# Altium PCB УШЯИ 758727.206-1.PcbDoc (part 2 of 2)
Units mm, origin at the board's own origin, x right, y up, seen from the top; angles counter-clockwise.
Board outline 245 x 230 mm, 2 copper layers (Top Layer, Bottom Layer), stack 1.571 mm thick; 127 components, 117 nets, 572 pads, 132 vias.
Unrouted connection lines stored in the file: 2.
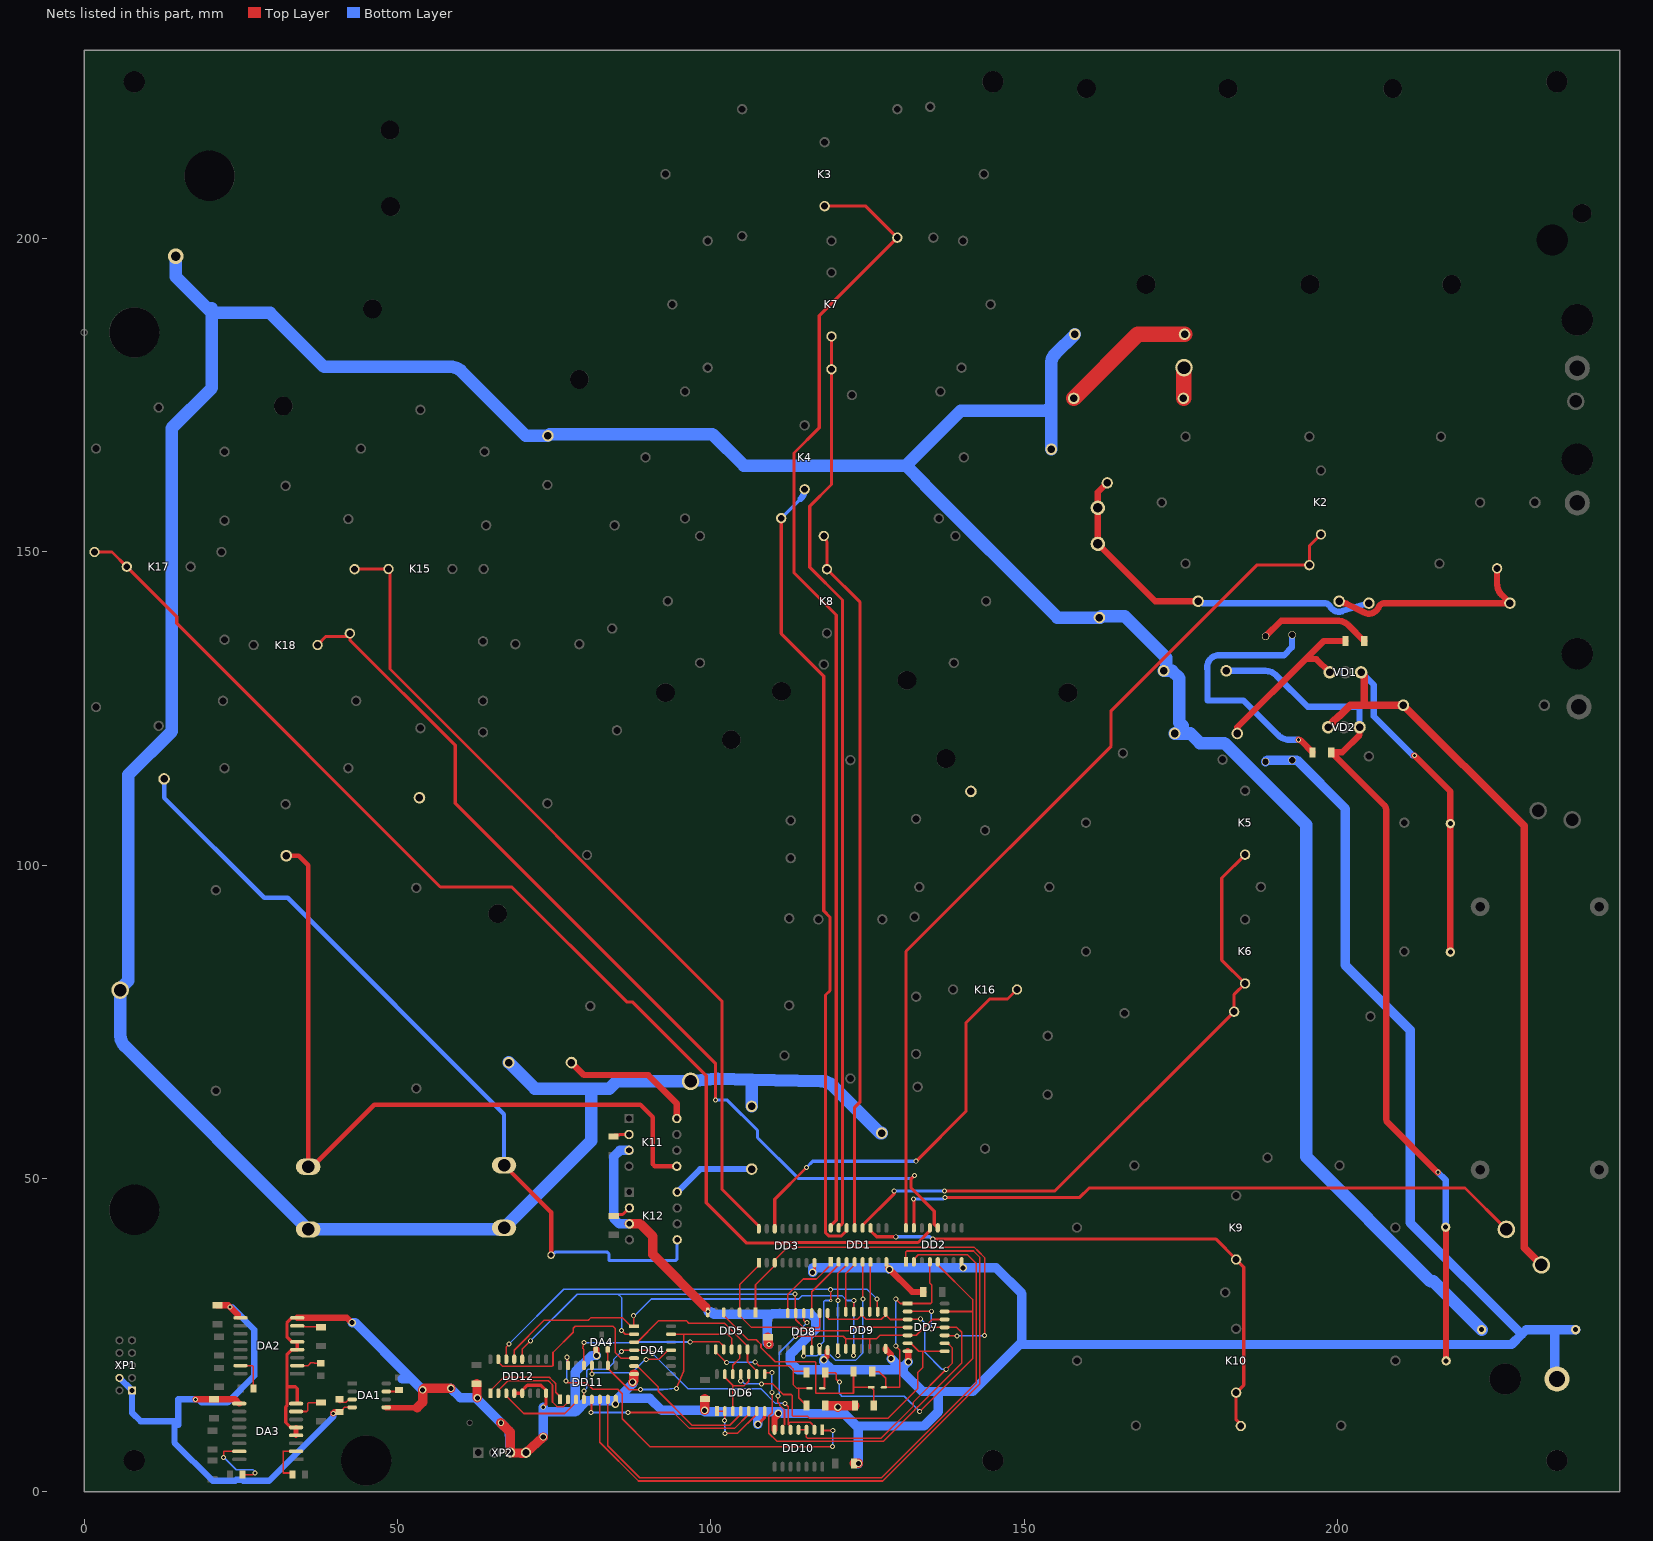
[diagram p2: the nets of this part, all layers, seen from the top]

## Via types
v1: diameter 0.8, hole 0.5, Top Layer to Bottom Layer, 107 vias
v2: diameter 1.2, hole 0.8, Top Layer to Bottom Layer, 24 vias
v3: diameter 0.5, hole 0.3, Top Layer to Bottom Layer, 1 vias

## Nets (pads, with @x,y where several pads share a name; then routed paths per layer and width w, separated by ;. In a path a pad name is that pad's centre, name@x,y a point inside that pad or via, vN(x,y) a via of type N, cw(c..) or ccw(c..) an arc to the next point about the centre after c; other vN are vias at no path point) (continued)
GND: C6.1 C7.2 pad.26@5.75,80.05 pad.26@96.75,65.5 R1.2 R6.2 R13.1 R17.1 R18.1 R19.2 R25.1 R26.1 R27.2 R28.2 R33.1 | length 661.5
  Bottom Layer w2: R33.1@14.607,197.162 14.607,193.893 20.385,188.115 29.68,188.115 38.295,179.5 58.448,179.5 cw(c58.448,176.96) 60.244,178.756 70.5,168.5 R25.1@74,168.5 74.25,168.75 100.25,168.75 105.25,163.75 131.125,163.75 ; 20.385,188.865 20.385,176.14 13.971,169.726 13.971,121.354 7,114.383 7,81.516 5.75,80.266 5.75,72.909 ccw(c8.29,72.909) 6.494,71.113 C6.1@35.742,41.865 66.388,41.865 ccw(c66.388,42.719) C7.2@66.992,42.115 80.875,55.998 80.875,64.321 ; R28.2@67.75,68.5 71.929,64.321 80.875,64.321 ; R27.2@106.5,61.5 106.501,65.771 ; R26.1@127.25,57.25 127,57.25 119.494,64.756 ccw(c117.698,62.96) 117.698,65.5 cw(c117.698,67.5) 117.649,65.501 106.501,65.771 ; R18.1@154.325,166.35 154.325,172.5 154.325,173.25 ; R6.2@158.075,184.7 154.911,181.536 ccw(c156.325,180.122) 154.725,181.322 ccw(c156.325,180.122) 154.325,180.122 154.325,173.25 ; R13.1@174,121 175.25,121 ; R1.2@222.992,25.865 215.273,33.584 214.857,33.584 195,53.442 195,106.415 181.947,119.468 178.032,119.468 176.5,121 175.25,121 ; 80.875,64.321 83.788,64.321 84.967,65.5 pad.26@96.75,65.5 ccw(c96.632,66.748) pad.26@96.75,65.5 97.421,65.565 100.836,65.896 cw(c101,64.25) 101.043,65.903 106.501,65.771 ; 131.125,163.75 139.875,172.5 153.575,172.5 154.325,173.25 ; 131.125,163.75 134.125,160.75 134.125,160.675 155.3,139.5 162.095,139.5 162.295,139.7 166.05,139.7 172.672,133.078 172.672,131.422 R19.2@172.25,131 173.578,131 174.75,129.828 174.75,122.75 175.25,122.25 175.25,121
GNDI: C2.2 C3.2 C8.2 C9.1 C10.1 C14.1 C15.1 C16.1 C20.2 C21.1 DA1.5 DA2.4 DA2.5 DA2.8 DA3.4 DA3.5 DA3.8 DA4.1 DD1.8 DD2.8 DD3.8 DD4.7 DD5.7 DD6.7 DD7.7 DD8.7 DD9.7 DD10.7 DD11.8 DD12.4 DD12.5 DD12.8 K11.3 K12.3 pad.38@235,18 R1.1 XP2.3 XP2.4 | length 602.3
  Top Layer w0.5: DA3.5@33.806,10.27 32.948,10.27 32.153,11.065 32.153,13.544 32.343,13.734 32.343,16.761 32.343,17 ; DA3.8@33.806,14.08 34,14.08 34,16.468 33.707,16.761 32.583,16.761 32.343,17 ; DA2.8@33.996,27.752 33.138,27.752 32.343,26.957 32.343,24.737 33.138,23.942 DA2.5@33.996,23.942 DA2.4@33.996,22.672 33.138,22.672 32.343,21.877 32.343,17 ; v2@42.669,27 v2(42.75,27) ; DD12.4@68.625,15.726 DD12.5@69.895,15.726 69.895,16.163 70.724,16.993 72.876,16.993 73.705,16.163 DD12.8@73.705,15.726 73.705,14.036 73.25,13.581 v1(73.25,13.5) ; v2(107.5,10.75) 108.556,11.806 108.556,12.856 DD6.7@108.575,12.875 ; v2(116.25,35) 116.25,35.189 116.508,35.448 116.508,36.524 DD3.8@116.537,36.553
  Top Layer w0.8: DA3.4@33.806,9 DA3.5@33.806,10.27 ; DA1.5@48.187,13.411 53.121,13.411 ; v2(118.025,21.05) 118.52,21.545 118.52,22.5 DD8.7@118.62,22.6
  Top Layer w1: DA2.8@33.996,27.752 41.916,27.752 v2@42.669,27 ; DA4.1@81.725,22.75 81.75,22.725 v2(81.75,21.75) ; DD10.7@110.165,9.9 110.165,11.756 110.712,12.303 110.712,12.462 v2(110.75,12.5) ; DD9.7@127.88,22.825 127.88,22.725 128.75,21.855 v2(128.75,21.25) ; v2@128.25,35.75 v2(128.5,35.5) 132.1,31.9 C16.1@133.9,31.9 ; DD7.7@131.4,22.42 131.5,22.32 v2(131.5,20.75)
  Top Layer w1.5: 53.121,13.411 54,14.29 v2(54,16.25) 54.25,16.5 v2(58.5,16.5) ; C10.1@62.625,17.225 62.675,17.175 62.675,15.075 v2(62.75,15) ; C8.2@66.5,11 67.96,9.54 XP2.3@67.96,6.25 69.704,6.141 ccw(c69.797,7.638) 70.094,6.168 XP2.4@70.5,6.25 v2(73.25,8.75) ; K12.3@87,42.75 88.75,42.75 90.75,40.75 90.75,37.861 99.179,29.432 ; v2(87.5,17.5) 87.7,17.7 87.7,18.745 DD4.7@87.75,18.795 ; v2(99,13) 99,14.8 C15.1@99.025,14.825 ; C9.1@109.1,24.675 109.15,24.625 109.15,23.753 109.25,23.653 v1(109.25,23.5) ; C21.1@118.5,13.707 120.043,13.707 v2(120.25,13.5) 120.5,13.75 C20.2@123,13.75 ; C14.1@122.85,4.55 v2(123.55,4.55)
  Bottom Layer w1.5: v2(42.75,27) 43.25,27 52.25,18 ; 50.75,18 52.25,18 ; v2(54,16.25) 52.25,18 ; v2(58.5,16.5) 60,15 v2(62.75,15) 62.75,14.75 C8.2@66.5,11 67.825,9.675 XP2.3@67.96,6.25 ; v2(73.25,8.75) 73.25,12.75 ; v1(73.25,13.5) 73.25,12.75 ; v2(81.75,21.75) 80.987,21.75 78.336,19.099 78.336,15.508 78.375,15.469 78.375,12.75 ; 85.896,14.896 90.25,14.896 92.146,13 v2(99,13) ; K11.3@86.94,54.48 85.48,54.48 84.5,53.5 84.5,43.629 85.379,42.75 K12.3@87,42.75 ; v2(87.5,17.5) 87.5,17.25 85.521,15.271 84.75,14.5 80.125,14.5 78.375,12.75 ; v2@99,12.804 107.897,12.804 ; v1(99.531,28.778) 99.559,28.75 100,28.75 100.429,28.321 109,28.321 ; v2(107.5,10.75) 107.5,12.407 107.897,12.804 ; v1(109.25,23.5) 109,23.75 109,28.321 ; v2(110.75,12.5) 110.806,12.5 v2@111.11,12.804 ; v2(116.25,35) 116.25,35.5 116.5,35.75 ; 116.25,35.75 116.5,35.75 ; v2(118.025,21.05) 118,21.025 118,20.75 119.25,19.5 ; v2(120.25,13.5) 121.25,12.5 ; v2(123.55,4.55) 123.5,4.5 123.5,10.25 123.25,10.5 ; v2(128.5,35.5) v2@128.5,35.75 ; v2(128.75,21.25) 130.052,19.948 130.698,19.948 ; 130.052,19.5 119.25,19.5 ; v2(131.5,20.75) 130.698,19.948 ; C3.2@188.5,116.5 188.75,116.75 193.5,116.75 201.25,109 201.25,84 211.563,73.688 211.563,42.937 229.375,25.125 ; pad.38@235,18 234.678,18.322 234.678,25.865 ; R1.1@237.992,25.865 234.678,25.865 ; 73.25,12.75 78.375,12.75 ; 107.897,12.804 v2@111.11,12.804 ; 109,28.321 109.757,28.321 109.821,28.385 115.907,28.385 116.729,27.563 116.729,25.979 112.677,21.927 112.677,20.685 113.862,19.5 119.25,19.5 ; v2@111.11,12.804 111.414,12.5 121.25,12.5 ; 116.5,35.75 v2@128.5,35.75 ; 121.25,12.5 123.25,10.5 ; 123.25,10.5 134,10.5 136.25,12.75 136.25,16 ; v2@128.5,35.75 v2(140.25,35.75) 145.5,35.75 149.625,31.625 149.625,23.861 149.264,23.5 ; 130.698,19.948 130.698,19.5 130.698,19.052 133.75,16 136.25,16 ; 136.25,16 141.764,16 149.264,23.5 ; 149.264,23.5 227.75,23.5 229.375,25.125 ; 229.375,25.125 230.115,25.865 234.678,25.865
  other v2: 84.75,14
GNDN: C13.1 DA1.4 DA2.9 DA3.9 R34.1 R35.1 XP1.1 XP1.4 | length 97.2
  Top Layer w0.254: C13.1@40.75,12.75 41.248,13.123 41.418,13.363 cw(c41.625,13.216) 41.428,13.375 cw(c41.625,13.216) 41.445,13.395 41.52,13.47 DA1.4@42.763,13.47
  Top Layer w0.5: 24.5,28.25 24.5,27.75 DA2.9@24.938,27.75
  Top Layer w1: v1(17.75,14.75) R35.1@20.75,14.75 21.25,14.75 24.08,14.75 DA3.9@24.75,14.08 ; R34.1@21.25,29.75 23,29.75 v1(23.25,29.5) 24.5,28.25 ; v1(39.75,12.5) 40,12.75 C13.1@40.75,12.75
  Bottom Layer w1: XP1.4@5.625,18.175 XP1.1@7.625,16.175 7.625,12.625 9,11.25 14.398,11.25 ; v1(23.25,29.5) 23.5,29.5 27.154,25.846 27.154,18.522 22.882,14.25 18.75,14.25 18.25,14.75 15,14.75 15.003,14.747 15.003,10.644 14.398,11.25 ; v1(39.75,12.5) 39.75,12 29.5,1.75 25.382,1.75 25.228,1.904 24.272,1.904 24.118,1.75 20.5,1.75 14.398,7.852 14.398,11.25
N1: DD1.1 DD8.13 | length 12.2
  Top Layer w0.254: DD8.13@112.27,28.5 112.27,31.493 114.731,33.955 116.837,33.955 119.122,36.24 DD1.1@119.122,36.678
N2: DD1.2 DD8.10 | length 10
  Top Layer w0.254: DD8.10@116.08,28.5 116.08,31.928 120.392,36.24 DD1.2@120.392,36.678
N3: DD1.3 DD9.1 | length 16.6
  Top Layer w0.254: v1(120.25,21.75) 120.255,21.755 120.255,22.82 DD9.1@120.26,22.825 ; v1(120.26,30.525) 120.26,34.839 121.662,36.24 DD1.3@121.662,36.678
  Bottom Layer w0.254: v1(120.25,21.75) 120.255,21.755 120.255,30.52 v1(120.26,30.525)
N4: DD1.4 DD9.13 | length 8.5
  Top Layer w0.254: DD9.13@121.53,28.725 121.53,34.838 122.932,36.24 DD1.4@122.932,36.678
N5: DD1.5 DD8.4 | length 25.8
  Top Layer w0.254: v1(114.81,21.69) DD8.4@114.81,22.6 ; DD1.5@124.202,36.678 124.226,36.654 124.226,30.774 v1(124.25,30.75)
  Bottom Layer w0.254: v1(114.81,21.69) 116.891,21.69 117.082,21.881 119.014,21.881 119.927,20.969 123.074,20.969 124.25,22.145 v1(124.25,30.75)
N6: DD1.6 DD9.10 | length 8
  Top Layer w0.254: DD9.10@125.34,28.725 125.406,28.791 125.406,36.612 DD1.6@125.472,36.678
N7: DD2.4 DD7.1 R42.1 VD7.2 | length 33.6
  Top Layer w0.254: R42.1@125.75,19.175 126.825,19.175 127.9,18.1 VD7.2@127.9,16.822 ; VD7.2@127.601,16.661 130.161,16.661 130.161,22.589 v1(129.5,23.25) ; VD7.2@127.803,16.822 VD7.2@127.9,16.725 ; v1(129.5,30.75) 130.21,30.04 DD7.1@131.4,30.04 135.061,30.04 135.21,30.189 135.21,33.022 134.932,33.3 DD2.4@134.932,36.678
  Bottom Layer w0.254: v1(129.5,23.25) 129.5,28.402 v1(129.5,30.75)
N8: DD2.5 DD7.13 R43.1 VD8.2 | length 56.3
  Top Layer w0.25: R43.1@118.5,19 119.854,19 120,18.854 120,17.962
  Top Layer w0.254: VD8.2@117.75,16.5 118.057,16.5 118.126,16.569 118.126,18.626 R43.1@118.5,19 ; 119.988,17.962 120.45,17.5 v1(120.5,17.5) ; v1(133.325,12.8) 141.751,21.226 141.751,28.77 ; DD2.5@136.202,36.678 136.202,36.24 141.751,30.691 141.751,28.77 ; DD7.13@137.3,28.77 141.751,28.77
  Top Layer w0.5: R43.1@118.25,19 R43.1@118.5,19
  Bottom Layer w0.254: v1(120.5,17.5) 120.5,15.742 120.738,15.504 ccw(c120.992,15.504) 120.992,15.25 130.77,15.25 cw(c130.77,14.996) 130.949,15.176 v1(133.325,12.8)
N9: DD3.1 DD5.3 DD7.4 | length 37.8
  Top Layer w0.254: DD3.1@107.647,36.553 107.647,36.115 104.575,33.043 DD5.3@104.575,28.625 104.575,28.125 106.47,26.23 113.85,26.23 114.388,25.692 122.132,25.692 122.67,26.23 DD7.4@131.4,26.23
N10: DD3.3 DD5.1 DD7.10 | length 63.5
  Top Layer w0.254: DD5.1@107.115,28.625 107.115,33.043 110.187,36.115 DD3.3@110.187,36.553 110.187,36.99 112.197,39 142.045,39 142.652,38.393 143.669,37.376 143.669,24.938 v1(143.656,24.925) ; DD7.10@137.3,24.96 137.355,24.905 139.195,24.905 v1(139.25,24.85)
  Bottom Layer w0.254: v1(139.25,24.85) 139.288,24.888 143.619,24.888 v1(143.656,24.925)
N11: DD6.3 DD6.10 DD6.13 | length 10.4
  Top Layer w0.254: DD6.13@102.225,18.775 102.225,18.275 103.495,17.005 103.495,16.9 ; DD6.3@103.495,12.875 103.495,16.9 ; DD6.10@106.035,18.775 106.035,17.66 105.275,16.9 103.495,16.9
N12: DD4.3 DD5.13 DD6.9 | length 26.2
  Top Layer w0.254: DD4.3@87.75,23.875 88.25,23.875 91.65,27.275 96.1,27.275 96.484,26.891 102.179,26.891 105.845,23.225 105.845,20.735 107.305,19.275 DD6.9@107.305,18.775
N13: DD2.1 DD11.6 | length 110.5
  Top Layer w0.254: DD11.6@82.28,14.738 82.28,7.895 88.45,1.725 127.425,1.725 142.875,17.175 142.875,37.451 141.904,38.422 131.271,38.422 131.122,38.273 DD2.1@131.122,36.678
N14: DD2.2 DD11.7 | length 104.9
  Top Layer w0.254: DD11.7@83.55,14.738 83.55,7.343 88.66,2.233 127.215,2.233 142.325,17.343 142.325,36.425 140.929,37.821 133.098,37.821 132.392,37.115 DD2.2@132.392,36.678
NetC1_2: pad.26@175.492,179.365 R3.1 | length 4.9
  Top Layer w0.254: R3.1@175.4,174.475 R3.1@175.446,174.521 ; pad.26@175.446,179.319 pad.26@175.492,179.365
  Top Layer w2.5: R3.1@175.446,174.521 pad.26@175.446,179.319
NetC2_1: C2.1 R15.2 | length 42.5
  Top Layer w1: v1(193.75,120) cw(c193.75,119.396) 194.177,119.823 R15.2@196,118
  Bottom Layer w1: C2.1@192.75,136.75 192.712,136.712 192.712,134.755 191.457,133.5 190.405,133.5 181.117,133.5 ccw(c181.108,131.583) 179.25,131.11 179.25,126.25 185,126.25 190.506,120.744 ccw(c192.302,122.54) 192.302,120 v1(193.75,120)
NetC3_1: C3.1 R14.2 | length 18
  Top Layer w1: C3.1@188.5,136.5 191,139 199.948,139 cw(c199.948,136.46) 201.744,138.256 R14.2@204.25,135.75
NetC4_2: 
NetC5_2: 
NetC6_2: C6.2 K11.5 | length 123.6
  Top Layer w0.7: 32.25,101.5 34.234,101.5 35.742,99.992 C6.2@35.742,51.865 36.392,51.865 46.277,61.75 88.75,61.75 90.75,59.75 90.75,52.25 91.06,51.94 K11.5@94.56,51.94
NetC7_1: C7.1 K12.5 pad.42 | length 128.4
  Top Layer w0.7: C7.1@67.128,52.115 68.006,51.237 68.006,51.101 74.5,44.607 pad.42@74.5,37.75
  Bottom Layer w0.5: pad.42@74.5,37.75 74.643,37.75 75.143,38.25 83.457,38.25 83.75,37.957 83.75,36.88 94.327,36.88 94.62,37.173 K12.5@94.62,40.21
  Bottom Layer w0.7: 12.75,113.75 12.75,110.75 28.716,94.784 32.466,94.784 66.992,60.258 C7.1@66.992,52.115
NetC11_1: C11.1 DA2.15 | length 5.6
  Top Layer w0.254: DA2.15@24.94,20.132 26.868,20.132 27,20 C11.1@27,16.5
NetC12_1: C12.1 DA3.15 | length 11.8
  Top Layer w0.254: v1(22.25,5.5) 22.25,6.5 24.71,6.5 DA3.15@24.75,6.46 ; C12.1@25.25,2.75 27,2.75 v1(27.25,3)
  Bottom Layer w0.254: v1(22.25,5.5) 24.25,3.5 25.846,3.5 25.896,3.55 26.95,3.55 27.25,3.25 v1(27.25,3)
NetC13_2: C13.2 DA1.3 | length 2.8
  Top Layer w0.254: C13.2@40.75,14.75 40.63,14.377 ccw(c40.855,14.493) 40.76,14.258 40.819,14.235 41.457,14.299 cw(c41.482,14.046) 41.482,14.3 41.778,14.3 42.218,14.74 DA1.3@42.763,14.74
NetC17_2: C17.2 DA1.7 | length 2.2
  Top Layer w0.25: DA1.7@48.187,16.01 49.99,16.01 50.23,16.25 C17.2@50.25,16.25
NetC18_1: C18.1 DA2.2 | length 4
  Top Layer w0.254: DA2.2@33.996,20.132 35.707,20.132 36.17,20.595 36.649,20.595 36.744,20.5 C18.1@37.75,20.5
NetC19_1: C19.1 DA3.2 | length 7.1
  Top Layer w0.254: C19.1@33.25,2.75 33,3 31.75,3 31.75,6.46 DA3.2@33.806,6.46
NetC20_1: C20.1 DD5.5 R42.2 VD7.1 | length 38.8
  Top Layer w0.254: DD5.5@102.035,28.625 102.035,28.125 105.91,24.25 107.25,24.25 108,23.5 108,23 110.25,20.75 116.601,20.75 116.75,20.601 116.75,15.75 122.75,15.75 122.75,16.661 ; R42.2@122.75,19.175 122.75,16.661 ; C20.1@126,13.75 126,16.261 VD7.1@125.6,16.661 122.75,16.661
NetC21_2: C21.2 DD5.9 R43.2 VD8.1 | length 24.9
  Top Layer w0.254: DD5.9@100.765,22.725 100.765,22.317 102.433,20.65 v1(102.525,20.65) ; v1(107.075,20.7) 107.658,20.117 112.583,20.117 113.112,19.588 113.112,19.25 ; 114,16.575 114,15 C21.2@115.25,13.75 ; R43.2@115.25,19 115,19.25 113.112,19.25 ; VD8.1@115.75,16.5 114,16.5 113.75,16.5 113.112,17.138 113.112,19.25
  Bottom Layer w0.254: v1(102.525,20.65) 102.55,20.675 107.05,20.675 v1(107.075,20.7)
NetDA2_7: DA2.7 R41.2 | length 3.9
  Top Layer w0.254: DA2.7@33.996,26.482 34.943,26.482 35.1,26.325 37.675,26.325 R41.2@37.75,26.25
NetDA3_7: DA3.7 R40.2 | length 5.2
  Top Layer w0.254: DA3.7@33.806,12.81 35.53,12.81 35.679,12.959 35.679,14.076 35.827,14.225 37.725,14.225 R40.2@37.75,14.25
NetDA4_2: DA4.2 DD4.13 DD5.11 DD11.10 | length 36.1
  Top Layer w0.254: DA4.2@83.55,22.75 83.425,22.625 83.425,22.225 83.55,22.1 83.55,19.724 86.974,16.3 v1(88.775,16.3) ; DD4.13@93.65,25.145 95.65,25.145 ; v1(94.5,16.5) 95.631,19.286 ccw(c95.396,19.382) 95.65,19.382 95.65,25.145 ; DD5.11@103.305,22.725 103.305,24.525 102.685,25.145 95.65,25.145
  Bottom Layer w0.254: v1(88.775,16.3) 88.8,16.325 92.34,16.325 ccw(c92.34,16.579) 92.36,16.326 v1(94.5,16.5)
NetDD4_1: DD4.1 DD9.3 DD9.12 DD12.13 | length 73.4
  Top Layer w0.254: DD12.13@68.625,21.15 68.625,22.605 73.375,27.354 80.41,27.354 80.806,27.75 85.915,27.75 87.25,26.415 DD4.1@87.75,26.415 87.675,26.49 v1(87.675,28.1) ; v1(122.75,21.75) 122.775,21.775 122.775,22.8 DD9.3@122.8,22.825 ; DD9.12@122.8,28.725 v1(122.8,30.525)
  Bottom Layer w0.254: v1(87.675,28.1) 87.824,28.1 90.487,30.763 114.038,30.763 114.581,31.306 120.904,31.306 121.685,30.525 v1(122.8,30.525) 122.775,30.5 122.775,21.775 v1(122.75,21.75)
NetDD4_2: DD4.2 DD8.9 DD8.12 DD12.12 | length 67.8
  Top Layer w0.254: DD12.12@69.895,21.15 69.91,21.165 69.91,22.785 v1(71.225,24.1) ; v1(85.75,25.75) 86.355,25.145 DD4.2@87.75,25.145 ; v1(113.425,31.544) 113.483,31.486 113.483,28.557 DD8.12@113.54,28.5 113.54,27.435 114.775,26.2 117.226,26.2 117.375,26.349 117.375,28.475 DD8.9@117.35,28.5
  Bottom Layer w0.254: v1(71.225,24.1) 78.669,31.544 85.2,31.544 ; v1(85.75,25.75) 85.75,30.994 85.2,31.544 ; v1(113.425,31.544) 85.2,31.544
NetDD4_4: DD4.4 DD10.2 DD10.5 DD11.4 | length 51.2
  Top Layer w0.254: DD11.4@79.74,14.738 v1(79.74,16.09) ; v1(85.75,22.4) 85.898,22.4 86.103,22.605 90.126,22.605 90.656,22.075 v1(90.7,22.075) ; v1(111.8,14.1) 112.33,13.57 112.33,10.775 ; DD10.5@112.705,9.9 112.705,10.4 112.33,10.775 ; DD10.2@116.515,9.9 116.515,10.4 115.834,11.081 112.636,11.081 112.33,10.775
  Bottom Layer w0.254: v1(79.74,16.09) 80.219,16.569 80.219,19.382 80.399,19.562 83.412,19.562 84.529,20.679 84.529,21.179 v1(85.75,22.4) ; v1(90.7,22.075) 96.331,16.444 107.981,16.444 110.325,14.1 v1(111.8,14.1)
NetDD4_5: DD4.5 DD12.15 | length 31
  Top Layer w0.254: DD12.15@66.085,21.15 66.085,20.712 66.791,20.006 74.658,20.006 74.806,20.155 74.806,22.231 78.034,25.459 78.034,26.101 78.348,26.415 84.394,26.415 84.708,26.101 84.708,22.259 85.632,21.335 86.211,21.335 DD4.5@87.75,21.335
NetDD4_6: DD4.6 DD6.4 | length 22.6
  Top Layer w0.254: DD4.6@87.75,20.065 88.25,20.065 91.594,16.721 91.594,16.027 97.002,10.619 103.009,10.619 104.765,12.375 DD6.4@104.765,12.875
NetDD4_11: DD4.11 DD11.12 | length 15.6
  Top Layer w0.254: v1(81,18.781) 81.005,18.786 81.005,20.157 DD11.12@81.01,20.162 ; v1(89.675,21.125) 91.67,21.125 93.15,22.605 DD4.11@93.65,22.605
  Bottom Layer w0.254: v1(81,18.781) 81.148,18.781 81.367,19 87.402,19 89.527,21.125 v1(89.675,21.125)
NetDD5_10: DD5.10 DD11.13 | length 27
  Top Layer w0.254: DD11.13@79.74,20.162 79.74,22.712 79.56,22.892 79.56,23.102 79.646,23.188 79.646,23.696 v1(79.75,23.8) ; v1(96.7,23.9) 96.775,23.975 101.285,23.975 102.035,23.225 DD5.10@102.035,22.725
  Bottom Layer w0.254: v1(79.75,23.8) 88.184,23.8 88.284,23.9 v1(96.7,23.9)
NetDD5_12: DD5.12 DD6.12 | length 4.4
  Top Layer w0.254: DD6.12@103.495,18.775 103.5,18.78 103.5,20.213 104.575,21.288 DD5.12@104.575,22.725
NetDD6_1: DD6.1 DD6.2 DD6.6 | length 11.6
  Top Layer w0.254: DD6.1@100.955,12.875 DD6.2@102.225,12.875 102.213,12.863 102.213,11.413 v1(102.2,11.4) ; v1(102.25,9.33) 104.26,9.33 107.305,12.375 DD6.6@107.305,12.875
  Bottom Layer w0.254: v1(102.2,11.4) v1(102.25,9.33)
NetDD6_5: DD6.5 DD11.5 | length 29.5
  Top Layer w0.254: v1(80.875,12.65) 80.943,12.718 80.943,14.67 DD11.5@81.01,14.738 ; v1(86.775,12.65) 94.031,12.65 96.57,10.111 103.771,10.111 106.035,12.375 DD6.5@106.035,12.55
  Bottom Layer w0.254: v1(80.875,12.65) v1(86.775,12.65)
NetDD6_8: DD6.8 DD7.2 DD7.11 | length 64.5
  Top Layer w0.254: DD6.8@108.575,18.775 108.575,18.846 108.735,19.006 v1(109.725,19.006) ; v1(109.775,15.875) 109.775,12.612 109.25,12.087 109.25,9.352 110.54,8.062 127.537,8.062 132.544,13.069 132.544,13.123 133.001,13.581 133.056,13.581 140.031,20.556 140.031,25.448 139.25,26.23 DD7.11@137.3,26.23 135.73,26.23 135.45,25.95 v1(135.175,25.95) ; DD7.2@131.4,28.77 131.415,28.785 135.16,28.785 v1(135.175,28.8)
  Bottom Layer w0.254: v1(109.725,19.006) 109.725,15.925 v1(109.775,15.875) ; v1(135.175,25.95) v1(135.175,28.8)
NetDD6_11: DD6.11 DD7.6 DD7.8 | length 47.7
  Top Layer w0.254: v1(104.765,17.681) DD6.11@104.765,18.775 ; v1(108.05,17.225) 109.839,17.225 111.532,15.532 112.819,15.532 112.968,15.383 112.968,12.181 113.117,12.032 115.468,12.032 115.75,11.75 128.25,11.75 133,16.5 133,19.025 133.825,19.85 133.825,22.42 ; DD7.6@131.987,23.603 133.17,22.42 133.825,22.42 ; DD7.8@137.3,22.42 133.825,22.42
  Bottom Layer w0.254: v1(104.765,17.681) 104.913,17.681 105.369,17.225 v1(108.05,17.225)
NetDD7_3: DD7.3 DD7.9 DD8.8 DD9.8 DD9.11 DD10.3 DD10.4 | length 63.1
  Top Layer w0.254: DD10.4@113.975,9.9 DD10.3@115.245,9.9 115.245,8.719 115.394,8.57 127.195,8.57 132.32,13.695 132.32,14.32 v1(137.55,19.55) 138.481,20.481 138.481,23.009 137.8,23.69 DD7.9@137.3,23.69 ; DD8.8@118.62,28.5 118.503,28.383 118.503,27.883 118.842,27.544 123.389,27.544 DD9.11@124.07,28.225 ; DD9.11@124.07,28.725 DD9.11@124.07,28.225 ; DD9.8@127.88,28.725 DD9.8@127.88,28.225 ; v1(133.443,27.607) 133.389,27.554 131.454,27.554 DD7.3@131.4,27.5 128.605,27.5 DD9.8@127.88,28.225 ; DD9.11@124.07,28.225 124.751,27.544 127.199,27.544 DD9.8@127.88,28.225
  Bottom Layer w0.254: v1(133.443,27.607) 134.15,26.9 134.15,22.25 136.85,19.55 v1(137.55,19.55)
NetDD7_5: DD7.5 DD7.12 DD8.5 DD8.11 DD9.2 DD10.6 | length 52.1
  Top Layer w0.254: v1(110.68,15.28) 110.68,14.295 111.019,13.955 111.019,13.777 111.75,13.045 111.75,10.722 111.435,10.407 DD10.6@111.435,9.9 ; v1(113.525,24.8) 116,24.8 ; DD8.11@114.81,28.5 114.81,27.331 115.055,27.085 115.221,27.085 v1(115.325,26.981) ; DD8.5@116.08,22.6 116.08,24.72 116,24.8 ; DD9.2@121.53,22.825 121.53,24.395 121.5,24.425 ; 125.34,22.825 125.34,24.365 125.4,24.425 ; DD7.12@137.3,27.5 135.3,27.5 132.76,24.96 DD7.5@131.4,24.96 126.975,24.96 126.42,24.405 126.4,24.425 125.4,24.425 ; 116,24.8 121.125,24.8 121.5,24.425 ; 121.5,24.425 125.4,24.425
  Bottom Layer w0.254: v1(110.68,15.28) 110.68,15.427 110.925,15.673 110.925,22.2 113.629,24.904 113.629,25.285 v1(115.325,26.981)
NetDD8_6: DD8.6 DD9.9 DD12.14 | length 78.7
  Top Layer w0.254: DD12.14@67.355,21.15 67.355,23.105 67.787,23.537 v1(67.787,23.6) ; DD8.6@117.35,22.6 v1(117.35,23.35) ; v1(119.075,32.25) 119.13,32.195 v3(119.13,30.525) ; v1(126.5,30.75) 126.555,30.695 126.555,28.78 DD9.9@126.61,28.725
  Bottom Layer w0.254: v1(67.787,23.6) 76.512,32.325 124.925,32.325 v1(126.5,30.75) ; v1(117.35,23.35) 118,24 118,30.351 118.149,30.5 118.225,30.5 118.25,30.525 v3(119.13,30.525) ; v1@119,32.25 v1(119.075,32.25)
NetDD10_1: DD10.1 DD11.15 | length 58.7
  Top Layer w0.254: v1(76.9,17.675) 77.175,17.4 80.1,17.4 81.15,16.35 85.15,16.35 85.85,15.65 85.85,11.65 90.3,7.2 v1(119.425,7.2) ; v1(77.045,21.47) 77.124,21.391 77.124,20.238 DD11.15@77.2,20.162 ; DD10.1@117.785,9.9 117.833,9.9 117.958,9.775 v1(119.45,9.775)
  Bottom Layer w0.254: v1(76.9,17.675) 76.973,17.748 76.973,21.398 v1(77.045,21.47) ; v1(119.425,7.2) 119.425,9.75 v1(119.45,9.775)
NetDD11_1: DD11.1 DD12.1 | length 14.9
  Top Layer w0.254: DD12.1@64.815,15.726 64.815,16.163 66.825,18.173 cw(c67.004,17.993) 66.851,18.196 cw(c67.004,17.993) 67.004,18.247 74.148,18.247 cw(c74.148,17.993) 74.3,18.196 cw(c74.148,17.993) 74.327,18.173 75.156,17.344 cw(c74.976,17.164) 75.18,17.317 cw(c74.976,17.164) 75.23,17.164 75.23,15.875 75.93,15.175 DD11.1@75.93,14.738
NetDD11_2: DD11.2 DD12.2 | length 16.2
  Top Layer w0.254: DD12.2@66.085,15.726 66.085,16.163 67.586,17.665 cw(c67.766,17.485) 67.613,17.688 cw(c67.766,17.485) 67.766,17.739 73.937,17.739 cw(c73.937,17.485) 74.117,17.665 74.648,17.134 cw(c74.468,16.954) 74.722,16.954 74.722,14.319 75.447,13.594 76.494,13.594 77.2,14.3 DD11.2@77.2,14.738
NetDD11_3: DD11.3 DD12.3 | length 13.9
  Top Layer w0.254: DD12.3@67.355,15.726 67.355,15.289 70.144,12.5 76.67,12.5 78.47,14.3 DD11.3@78.47,14.738
NetK2_1: pad.2 pad.40 R8.2 R9.2 | length 58.2
  Top Layer w1: pad.40@163.25,161 161.75,159.5 161.75,157.352 pad.2@161.75,157 pad.2@161.75,157 161.749,155.251 161.75,155.25 pad.2@161.75,151.25 170.885,142.115 R8.2@177.742,142.115
  Bottom Layer w1: R8.2@177.742,142.115 ccw(c178.502,142.875) 178.502,141.8 197.91,141.8 cw(c197.908,140.8) 198.778,141.292 ccw(c200.242,142.115) 200.729,140.508 R9.2@205,141.8
NetK2_2: pad.23@225.45,147.35 R8.1 R9.1 | length 34.7
  Top Layer w1: R8.1@200.242,142.115 ccw(c201.002,142.875) 201.002,141.8 cw(c201.002,140.8) 201.449,141.695 204.251,140.297 ccw(c205,141.8) 206.559,141.175 cw(c207.485,140.8) 207.483,141.8 R9.1@227.5,141.8 226.194,143.106 cw(c227.99,144.902) 225.45,144.902 pad.23@225.45,147.35
NetK3_1: 
NetK3_2: 
NetK4_2: 
NetK5_2: 
NetK6_2: R20.1
NetK7_1: 
NetK8_2: 
NetK9_2: 
NetK10_2: R22.1
NetK11_2: K11.2 R23.2 | length 2.6
  Top Layer w0.5: R23.2@84.475,56.7 84.725,56.95 85.37,56.95 85.44,57.02 K11.2@86.94,57.02
NetK11_8: K11.8 R28.1 | length 21.9
  Top Layer w1: R28.1@77.75,68.5 79.75,66.5 90,66.5 94.534,61.966 94.534,59.586 K11.8@94.56,59.56
NetK12_2: K12.2 R24.2 | length 3
  Top Layer w0.5: R24.2@84.5,44 84.75,44.25 85.919,44.25 86.959,45.29 K12.2@87,45.29
NetK12_8: K12.8 R27.1 | length 13.4
  Bottom Layer w1: K12.8@94.62,47.83 98.29,51.5 R27.1@106.5,51.5
NetK13_2: 
NetK14_2: 
NetK15_2: R29.1
NetK16_2: R30.1
NetK17_2: R31.1
NetK18_2: R32.1
NetR2_2: 
NetR3_2: R3.2 R6.1 | length 21.9
  Top Layer w2.5: R3.2@157.9,174.475 168.125,184.7 R6.1@175.575,184.7
NetR5_2: 
NetR7_2: pad.26@232.525,36.2 R7.2 VD1.3 VD2.1 | length 117.5
  Top Layer w1.2: VD2.1@198.5,122 199.146,122.646 199.146,122.768 200.232,123.854 200.354,123.854 202,125.5 204.25,125.5 ; VD1.3@203.75,130.75 204.25,130.25 204.25,125.5 ; R7.2@210.375,125.5 R7.2@210.5,125.5 ; pad.26@232.525,36.2 229.75,38.975 229.75,106.25 R7.2@210.5,125.5 ; 204.25,125.5 R7.2@210.5,125.5
NetR10_2: 
NetR11_2: 
NetR13_2: R13.2 R14.1 R16.1 VD1.1 | length 79.4
  Top Layer w1: R13.2@184,121 184,122 194.875,132.875 ; VD1.1@198.75,130.75 196.625,132.875 194.875,132.875 ; R14.1@201.25,135.75 197.75,135.75 194.875,132.875 ; v1(212.25,117.5) 217.992,111.758 217.992,86.115
  Bottom Layer w1: 203.75,130.75 205.75,128.75 205.75,123.75 212,117.5 v1(212.25,117.5)
NetR15_1: R15.1 R19.1 R21.1 VD2.3 | length 138.3
  Top Layer w1: VD2.3@203.5,122 203.5,120.75 200.75,118 R15.1@199,118 207.457,109.543 cw(c206.75,108.836) 207.75,108.836 207.75,59.576 ccw(c208.75,59.576) 208.043,58.868 215.75,51.161 215.911,51 v1(216,51) ; R21.1@217.25,42.225 217.288,42.188 217.288,20.937 217.325,20.9
  Bottom Layer w1: R19.1@182.25,131 188.448,131 cw(c188.448,128.46) 190.244,130.256 195.25,125.25 203.5,125.25 VD2.3@203.5,122 ; v1(216,51) 217.25,49.75 R21.1@217.25,42.225
O1: DD1.16 K3.3 pad.23@129.742,200.115 | length 181.7
  Top Layer w0.5: K3.3@118.15,205.15 124.707,205.15 pad.23@129.742,200.115 117.294,187.667 117.294,169.794 113.253,165.753 113.253,146.652 120,139.905 120,43.32 119.295,42.614 119.238,42.614 119.122,42.499 DD1.16@119.122,42.102
O2: DD1.15 K7.3 pad.23@119.242,179.115 | length 146.2
  Top Layer w0.5: K7.3@119.242,184.365 pad.23@119.242,179.115 119.242,160.742 115.779,157.279 115.779,147.529 121,142.308 121,42.807 120.807,42.615 120.575,42.615 120.392,42.432 DD1.15@120.392,42.102
O3: DD1.14 K4.3 pad.23@111.225,155.35 | length 128
  Top Layer w0.5: pad.23@111.225,155.35 111.225,136.927 118,130.152 118,92.697 119,91.697 119,79.974 118.293,79.267 118.293,41.321 118.779,40.835 120.833,40.835 121.613,41.615 121.613,42.053 DD1.14@121.662,42.102
  Bottom Layer w0.5: pad.23@111.225,155.35 114.35,158.475
  Bottom Layer w1: 114.35,158.475 ccw(c112.859,159.965) K4.3@114.967,159.965
O4: DD1.13 K8.3 pad.23@118.017,152.515 | length 113.1
  Top Layer w0.5: pad.23@118.017,152.515 cw(c116.81,151.308) 118.517,151.308 K8.3@118.517,147.215 123.806,141.926 123.806,62.223 122.932,61.349 DD1.13@122.932,42.102
O5: DD1.12 K5.3 K6.3 pad.23@183.492,76.615 | length 103
  Top Layer w0.5: DD1.12@124.202,42.102 124.202,42.539 129.25,47.587 v1(129.25,48) ; v1(137.248,48.024) 137.272,48 154.877,48 pad.23@183.492,76.615 183.492,79.365 K6.3@185.242,81.115 181.525,84.832 181.525,97.948 K5.3@185.242,101.665
  Bottom Layer w0.5: v1(129.25,48) 129.262,48.012 137.236,48.012 v1(137.248,48.024)
O6: DD1.11 K9.3 K10.3 pad.23@184.55,10.5 | length 88.6
  Top Layer w0.5: DD1.11@125.472,42.102 125.472,41.664 126.441,40.695 v1(129.5,40.695) ; v1(135.4,40.35) 180.532,40.35 K9.3@183.817,37.065 185.023,35.859 185.023,17.021 K10.3@183.817,15.815 183.817,11.473 184.55,10.74 pad.23@184.55,10.5
  Bottom Layer w0.5: v1(129.5,40.695) 134.907,40.695 135.252,40.35 v1(135.4,40.35)
O7: DD2.13 K17.3 pad.23@1.642,149.965 | length 192.7
  Top Layer w0.5: pad.23@1.642,149.965 4.442,149.965 K17.3@6.792,147.615 14.772,139.635 14.772,138.569 56.841,96.5 68.25,96.5 86.568,78.182 87.477,78.182 99.25,66.409 99.25,46.108 105.633,39.725 112.203,39.725 112.269,39.791 133.058,39.791 134.932,41.664 DD2.13@134.932,42.102
O8: DD2.12 K18.3 pad.23@42.392,136.965 | length 152.8
  Top Layer w0.5: K18.3@37.242,135.115 37.242,135.177 38.54,136.475 41.902,136.475 pad.23@42.392,136.965 42.392,135.923 59.198,119.117 59.198,109.851 100.75,68.298 v1(100.75,62.5) ; v1(132.5,50.5) 131.948,49.948 131.948,48.472 135.65,44.77 135.65,42.654 DD2.12@136.202,42.102
  Bottom Layer w0.5: v1(100.75,62.5) 102.615,62.5 107.441,57.674 107.441,56.517 113.948,50.01 132.01,50.01 v1(132.5,50.5)
O9: DD3.16 K15.3 pad.23@43.142,147.215 | length 135.2
  Top Layer w0.5: pad.23@43.142,147.215 43.16,147.233 48.533,147.233 K15.3@48.55,147.25 48.792,147.008 48.792,131.283 101.781,78.294 101.781,48.28 107.647,42.414 DD3.16@107.647,41.977
O10: DD3.14 K16.3 | length 65.5
  Top Layer w0.5: DD3.14@110.187,41.977 110.187,46.687 v1(115.25,51.75) ; v1(132.75,52.75) 140.703,60.703 140.703,74.857 144.479,78.633 147.333,78.633 K16.3@148.85,80.15
  Bottom Layer w0.5: v1(115.25,51.75) 116.25,52.75 v1(132.75,52.75)
O13: DD2.16 K2.3 pad.23@195.492,147.865 | length 143
  Top Layer w0.5: DD2.16@131.122,42.102 131.122,86.239 163.866,118.983 163.866,124.637 187.094,147.865 pad.23@195.492,147.865 195.492,150.915 K2.3@197.342,152.765
O14: DD2.15 pad.26@226.925,41.875 | length 102.7
  Top Layer w0.5: v1(132.325,46.75) 132.392,46.683 DD2.15@132.392,42.102 ; v1(137.35,46.975) 158.872,46.975 160.368,48.471 220.329,48.471 pad.26@226.925,41.875
  Bottom Layer w0.5: v1(132.325,46.75) 137.125,46.75 v1(137.35,46.975)
OUT: R33.2
pads on no net: DA2.6 DA2.10 DA2.11 DA2.14 DA3.6 DA3.10 DA3.11 DA3.14 DD1.7 DD1.10 DD2.3 DD2.6 DD2.7 DD2.10 DD2.11 DD2.14 DD3.5 DD3.6 DD3.7 DD3.10 DD3.11 DD3.12 DD4. DD4.8 DD4.9 DD4.10 DD5. DD6. DD7. DD8. DD8.1 DD8.2 DD8.3 DD9. DD9.4 DD9.5 DD9.6 DD10. DD10.8 DD10.9 DD10.10 DD10.11 DD10.12 DD10.13 DD11.9 DD12.7 DD12.9 DD12.10 DD12.11 Designator65.1 Designator66.1 Designator67.1 Designator68.1 Designator69.1 Designator70.1 Designator71.1 Designator72.1 Designator73.1 Designator74.1 Designator75.1 Designator76.1 Designator77.1 Designator78.1 Designator79.1 Designator81.1 Designator82.1 Designator83.1 Designator84.1 K1.17 K1.18 K1.19 K1.20 K2. K3. K4. K5. K6. K7. K8. K9. K10. K11.1 K11.4 K11.6 K11.7 K12.1 K12.4 K12.6 K12.7 K13. K14. K15. K16. K17. K18. VD1.2 VD2.2
copper on no net: | length 0.1
  Top Layer w0.254: 126.61,22.825 126.655,22.78 ; 126.61,28.725 126.618,28.732
  Top Layer w1: 200.981,122 201,122

## Other copper
Bottom Layer:
  text "поправить" at 51.25,108.374 h2

## Silkscreen, mask and mechanical layers (free items; w line width, h text height)
Top Overlay:
  drawing of 192 lines, arcs and shapes, not listed
  text "758725.206-1" at 28.75,222.75 h5
  text "ВЫХОД" at 13.75,218.06 h5
  text "3000V" at 240,201.75 h5 r270
  text "687245.044" at 18,197 h5
  text "1000V" at 240.992,184.865 h5 r270
  text "300V" at 240,155.25 h5 r270
  text "30V" at 240.25,122.5 h5 r270
  text "HV" at 95.575,32.575 h3
  text "DG" at 94.25,29 h3
  text "1" at 10.5,16.5 h5 r270
  text "GND" at 243.242,14.615 h5 r90
Mechanical 1:
  the board outline again, w0.2
Drill Drawing:
  drawing of 157 lines, arcs and shapes, not listed
  text "Symbol" at 86.215,297.522 h1.83
  text "Count" at 92.628,297.522 h1.83
  text "Hole Size" at 99.81,297.522 h1.83
  text "Plated" at 107.94,297.522 h1.83
  text "1" at 92.628,294.432 h1.52
  text "0.300mm" at 99.81,294.432 h1.52
  text "PTH" at 107.94,294.432 h1.52
  text "B" at 85.582,294.178 h1.37
  text "107" at 92.628,291.341 h1.52
  text "0.500mm" at 99.81,291.341 h1.52
  text "PTH" at 107.94,291.341 h1.52
  text "2" at 92.628,288.25 h1.52
  text "0.700mm" at 99.81,288.25 h1.52
  text "PTH" at 107.94,288.25 h1.52
  text "2" at 92.628,285.159 h1.52
  text "0.800mm" at 99.81,285.159 h1.52
  text "NPTH" at 107.94,285.159 h1.52
  text "A" at 85.582,284.905 h1.37
  text "40" at 92.628,282.068 h1.52
  text "0.800mm" at 99.81,282.068 h1.52
  text "PTH" at 107.94,282.068 h1.52
  text "16" at 92.628,278.978 h1.52
  text "0.900mm" at 99.81,278.978 h1.52
  text "PTH" at 107.94,278.978 h1.52
  text "4" at 92.628,275.887 h1.52
  text "1.000mm" at 99.81,275.887 h1.52
  text "PTH" at 107.94,275.887 h1.52
  text "153" at 92.628,272.796 h1.52
  text "1.100mm" at 99.81,272.796 h1.52
  text "PTH" at 107.94,272.796 h1.52
  text "1" at 92.628,269.705 h1.52
  text "1.200mm" at 99.81,269.705 h1.52
  text "NPTH" at 107.94,269.705 h1.52
  text "33" at 92.628,266.615 h1.52
  text "1.200mm" at 99.81,266.615 h1.52
  text "PTH" at 107.94,266.615 h1.52
  text "7" at 92.628,263.524 h1.52
  text "1.500mm" at 99.81,263.524 h1.52
  text "PTH" at 107.94,263.524 h1.52
  text "13" at 92.628,260.433 h1.52
  text "2.000mm" at 99.81,260.433 h1.52
  text "PTH" at 107.94,260.433 h1.52
  text "3" at 92.628,257.342 h1.52
  text "2.500mm" at 99.81,257.342 h1.52
  text "NPTH" at 107.94,257.342 h1.52
  text "C" at 85.582,257.089 h1.37
  text "1" at 92.628,254.252 h1.52
  text "2.500mm" at 99.81,254.252 h1.52
  text "PTH" at 107.94,254.252 h1.52
  text "19" at 92.628,251.161 h1.52
  text "3.000mm" at 99.81,251.161 h1.52
  text "NPTH" at 107.94,251.161 h1.52
  text "6" at 92.628,248.07 h1.52
  text "3.400mm" at 99.81,248.07 h1.52
  text "NPTH" at 107.94,248.07 h1.52
  text "5" at 92.628,244.979 h1.52
  text "5.000mm" at 99.81,244.979 h1.52
  text "NPTH" at 107.94,244.979 h1.52
  text "D" at 85.582,244.725 h1.37
  text "4" at 92.628,241.889 h1.52
  text "8.000mm" at 99.81,241.889 h1.52
  text "NPTH" at 107.94,241.889 h1.52
  text "417 Total" at 92.628,238.798 h1.52

## Text inside footprints (layer, text, board x,y; h text height)
C6: Top Overlay "+" at 38.492,42.165 h2 r270
C7: Top Overlay "+" at 64.242,51.815 h2 r90